# Altium PCB LinoByte - Char.PcbDoc (part 1 of 2)
Units mm, origin at the board's own origin, x right, y up, seen from the top; angles counter-clockwise.
Board outline 23 x 220 mm, 4 copper layers (Top Layer, Mid1, Mid2, Bottom Layer), stack 0.778 mm thick; 224 components, 110 nets, 606 pads, 169 vias.
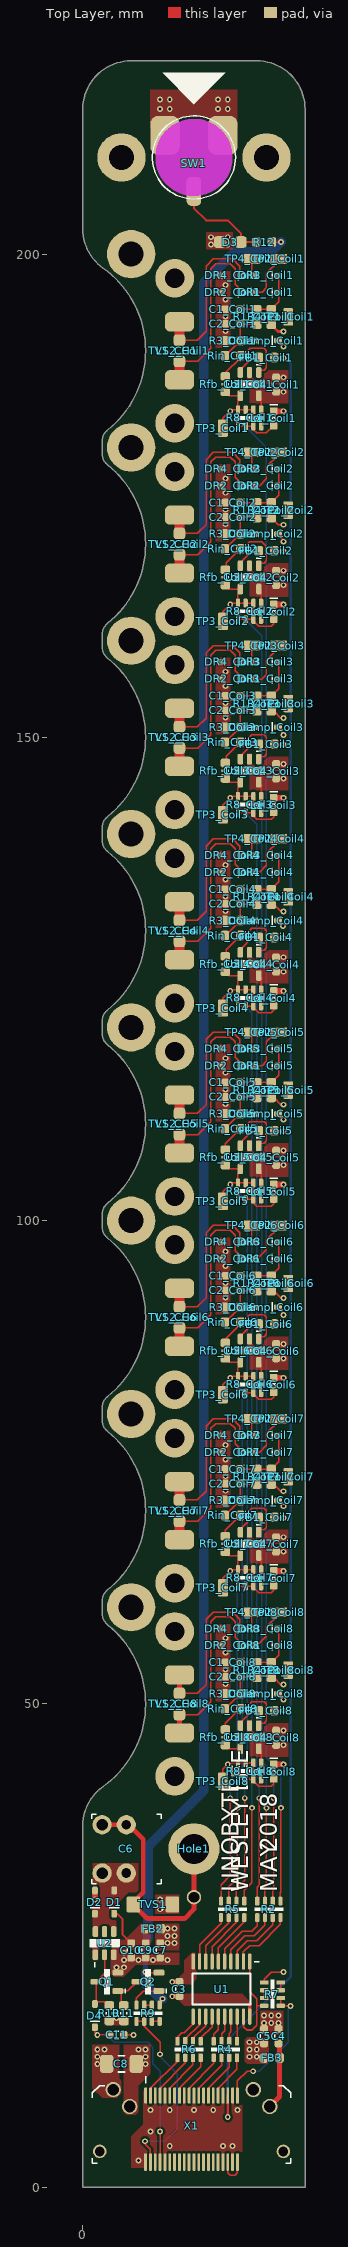
[diagram p0: Top Layer view]
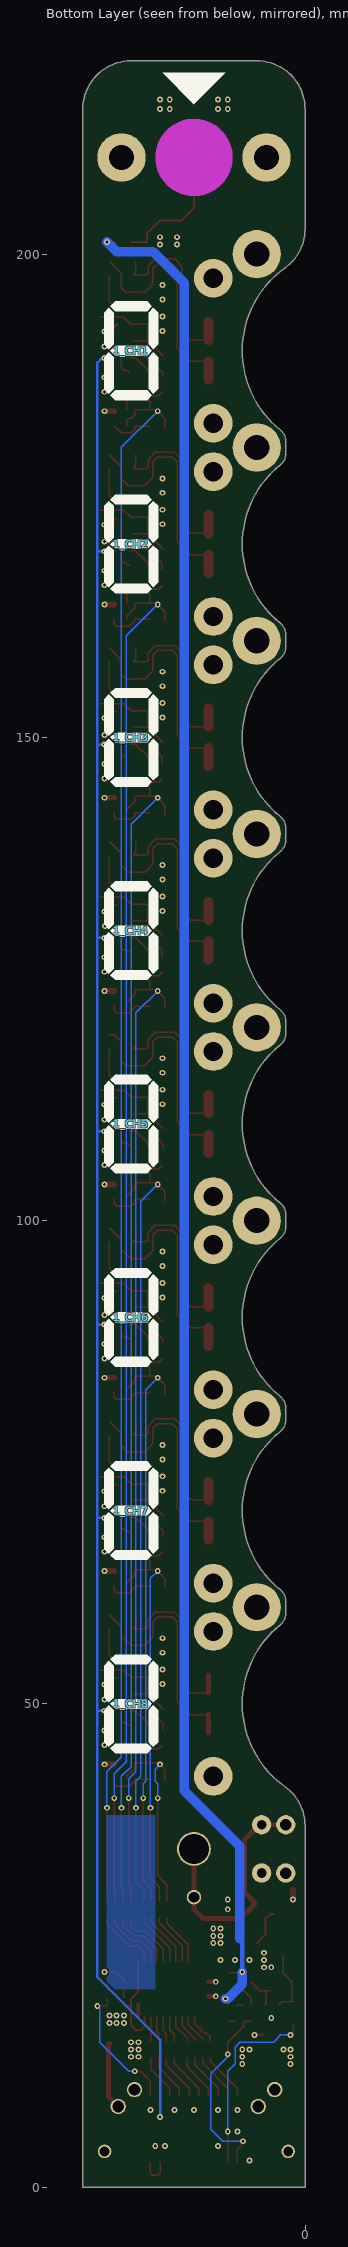
[diagram p1: Bottom Layer view, seen from below]
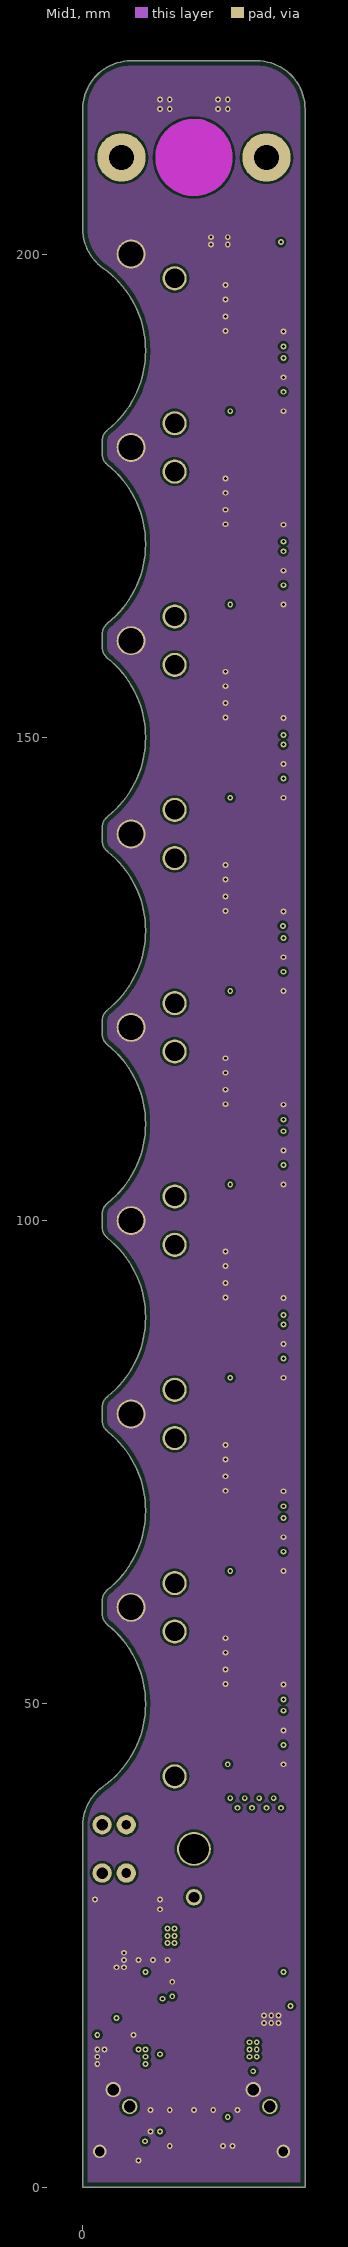
[diagram p2: Mid1]
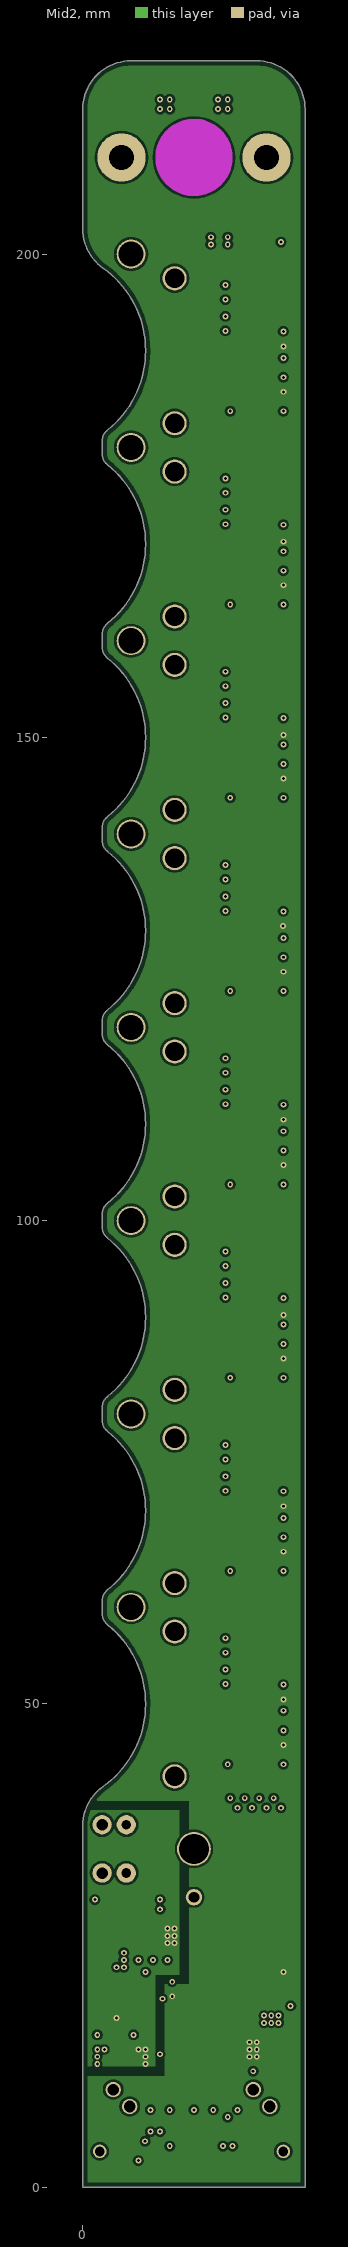
[diagram p3: Mid2]
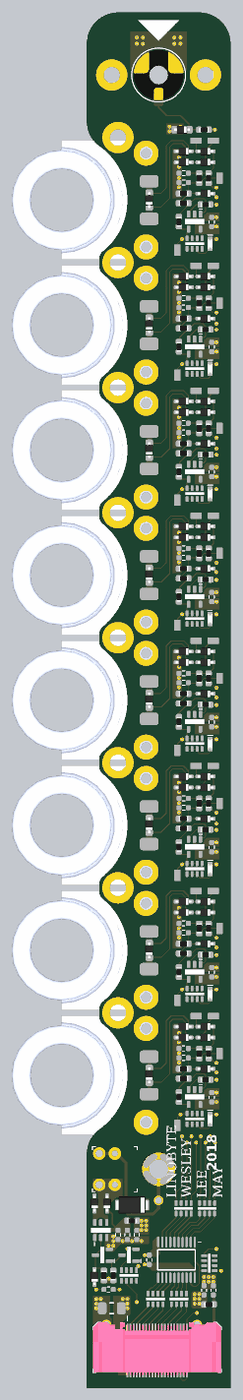
[diagram p5: 3D render of the assembled board from above, using the file's embedded part models]

## Layer stack, top to bottom
Top Solder: solder mask 0.0102, Solder Resist, Dk 3.5
Top Layer: signal copper 0.0356
Dielectric 1: core 0.254, FR-4, Dk 4.2
Mid1: signal copper 0.036
Dielectric 3: prepreg 0.127, Dk 4.2
Mid2: signal copper 0.036
Dielectric 2: core 0.254, Dk 4.2
Bottom Layer: signal copper 0.0356
Bottom Solder: solder mask 0.0102, Solder Resist, Dk 3.5

## Board outline
0,37.381 cw(c5,37.381) 2.097,41.451 ccw(c-4,50) 2.562,58.197 2.563,58.197 cw(c3.5,59.367) 2,59.367 2,60.633 cw(c3.5,60.633) 2.563,61.803 2.562,61.803 ccw(c-4,70) 2.562,78.197 2.563,78.197 cw(c3.5,79.367) 2,79.367 2,80.633 cw(c3.5,80.633) 2.563,81.803 2.562,81.803 ccw(c-4,90) 2.562,98.197 2.563,98.197 cw(c3.5,99.367) 2,99.367 2,100.633 cw(c3.5,100.633) 2.563,101.803 2.562,101.803 ccw(c-4,110) 2.562,118.197 2.563,118.197 cw(c3.5,119.367) 2,119.367 2,120.633 cw(c3.5,120.633) 2.563,121.803 2.562,121.803 ccw(c-4,130) 2.562,138.197 2.563,138.197 cw(c3.5,139.367) 2,139.367 2,140.633 cw(c3.5,140.633) 2.563,141.803 2.562,141.803 ccw(c-4,150) 2.562,158.197 2.563,158.197 cw(c3.5,159.367) 2,159.367 2,160.633 cw(c3.5,160.633) 2.563,161.803 2.562,161.803 ccw(c-4,170) 2.562,178.197 2.563,178.197 cw(c3.5,179.367) 2,179.367 2,180.633 cw(c3.5,180.633) 2.563,181.803 2.562,181.803 ccw(c-4,190) 2.097,198.549 cw(c5,202.619) 0,202.619 0,215 cw(c5,215) 5,220 18,220 cw(c18,215) 23,215 23,0 0,0

## Design rules (kind name [scope] priority, off if disabled: settings)
BoardOutlineClearance BoardOutlineClearance-Mid [OnLayer('Mid1') or OnLayer('Mid2')] p1: gap=0.5 ignorepadtopadclearanceinfootprint=FALSE
BoardOutlineClearance [All] p2: gap=0.25 ignorepadtopadclearanceinfootprint=FALSE except(0: Arc-SplitContinuation Track-SplitContinuation SMDPad-SplitContinuation THPad-SplitContinuation Via-SplitContinuation Fill-SplitContinuation Poly-SplitContinuation Region-SplitContinuation Text-SplitContinuation)
Clearance Clearance-xPP-xTP-xTT [All] p1: gap=0.15 ignorepadtopadclearanceinfootprint=FALSE except(0: Arc-Hole Track-Hole SMDPad-Hole THPad-Hole Via-Hole Fill-Hole Poly-Hole Region-Hole Text-Hole; 0.25: Arc-Fill Arc-Poly Arc-Region Track-Fill Track-Poly Track-Region SMDPad-Fill SMDPad-Poly SMDPad-Region THPad-Fill THPad-Poly THPad-Region Via-Fill Via-Poly Via-Region Fill-Fill Fill-Poly Fill-Region Poly-Poly Poly-Region Region-Region)
ComponentClearance [All] p1: gap=0.25 collisioncheckmode=3 verticalgap=0.25 showdistances=FALSE
DiffPairsRouting [All] p1: maxlimit=0.25 minlimit=0.25 mostfreqgap=0.25 toplayer_minwidth=0.381 toplayer_maxwidth=0.381 toplayer_prefwidth=0.381 midlayer1_minwidth=0.381 midlayer1_maxwidth=0.381 midlayer1_prefwidth=0.381 midlayer2_minwidth=0.381 midlayer2_maxwidth=0.381 midlayer2_prefwidth=0.381 bottomlayer_minwidth=0.381 bottomlayer_maxwidth=0.381 bottomlayer_prefwidth=0.381 maxuncoupledlength=12.5
Height [All] p1: minheight=0 maxheight=25 prefheight=12.5
HoleSize HoleSize-PTH [All] p1: absolutevalues=TRUE maxlimit=6 minlimit=0.25 maxpercent=80.000 minpercent=20.000
HoleToHoleClearance [All] p1: gap=0.35 allowstackedmicrovias=TRUE
MinimumAnnularRing "Minimum IAR  >0.45mm" [((ObjectKind = 'Pad') OR (ObjectKind = 'Via')) And (Layer = 'MultiLayer') And (HoleDiameter > AsMM(0.45))] p1: minimumring=0.175 // minimum inner annular ring for pads > 0.45mm finished hole size
MinimumAnnularRing "Minimum IAR <=0.45mm" [((ObjectKind = 'Pad') OR (ObjectKind = 'Via')) And (Layer = 'MultiLayer') And (HoleDiameter <= AsMM(0.45))] p2: minimumring=0.15 // minimum inner annular ring for pads <= 0.45mm finished hole size
MinimumSolderMaskSliver [All] p1: minsoldermaskwidth=0.08
PlaneClearance PlaneClearance-IPI [All] p1: clearance=0.5
PlaneConnect [All] p1: planeconnectstyle=Relief reliefexpansion=0.175 reliefentries=4 reliefconductorwidth=0.2 reliefairgap=0.2
PolygonConnect PolygonConnect-xTW [All] p1: connectstyle=Direct reliefconductorwidth=0.2 reliefentries=4 polygonreliefangle="90 Angle" airgapwidth=0.2
RoomDefinition Coil1 [InComponentClass('Coil1')] p1: confinementstyle=ConfineIn formatcopy=TRUE lockcomponents=FALSE outline 8.871,187.944 8.871,192.056 13.521,192.056 13.521,198.929 16.244,198.929 16.244,200.356 21.506,200.356 21.506,194.756 22.106,194.756 22.106,192.244 20.979,192.244 20.979,189.921 20.779,189.921 20.779,184.871 20.779,181.324 19.329,181.324 19.329,181.271 15.356,181.271 15.356,180.744 13.644,180.744 13.644,187.944
RoomDefinition Coil2 [InComponentClass('Coil2')] p2: confinementstyle=ConfineIn formatcopy=TRUE lockcomponents=FALSE outline 8.871,167.944 8.871,172.056 13.521,172.056 13.521,178.929 16.244,178.929 16.244,180.356 21.506,180.356 21.506,174.756 22.106,174.756 22.106,172.244 20.979,172.244 20.979,169.921 20.779,169.921 20.779,164.871 20.779,161.324 19.329,161.324 19.329,161.271 15.356,161.271 15.356,160.744 13.644,160.744 13.644,167.944
RoomDefinition Coil3 [InComponentClass('Coil3')] p3: confinementstyle=ConfineIn formatcopy=TRUE lockcomponents=FALSE outline 8.871,147.944 8.871,152.056 13.521,152.056 13.521,158.929 16.244,158.929 16.244,160.356 21.506,160.356 21.506,154.756 22.106,154.756 22.106,152.244 20.979,152.244 20.979,149.921 20.779,149.921 20.779,144.871 20.779,141.324 19.329,141.324 19.329,141.271 15.356,141.271 15.356,140.744 13.644,140.744 13.644,147.944
RoomDefinition Coil4 [InComponentClass('Coil4')] p4: confinementstyle=ConfineIn formatcopy=TRUE lockcomponents=FALSE outline 8.871,127.944 8.871,132.056 13.521,132.056 13.521,138.929 16.244,138.929 16.244,140.356 21.506,140.356 21.506,134.756 22.106,134.756 22.106,132.244 20.979,132.244 20.979,129.921 20.779,129.921 20.779,124.871 20.779,121.324 19.329,121.324 19.329,121.271 15.356,121.271 15.356,120.744 13.644,120.744 13.644,127.944
RoomDefinition Coil5 [InComponentClass('Coil5')] p5: confinementstyle=ConfineIn formatcopy=TRUE lockcomponents=FALSE outline 8.871,107.944 8.871,112.056 13.521,112.056 13.521,118.929 16.244,118.929 16.244,120.356 21.506,120.356 21.506,114.756 22.106,114.756 22.106,112.244 20.979,112.244 20.979,109.921 20.779,109.921 20.779,104.871 20.779,101.324 19.329,101.324 19.329,101.271 15.356,101.271 15.356,100.744 13.644,100.744 13.644,107.944
RoomDefinition Coil7 [InComponentClass('Coil7')] p6: confinementstyle=ConfineIn formatcopy=TRUE lockcomponents=FALSE outline 8.871,67.944 8.871,72.056 13.521,72.056 13.521,78.929 16.244,78.929 16.244,80.356 21.506,80.356 21.506,74.756 22.106,74.756 22.106,72.244 20.979,72.244 20.979,69.921 20.779,69.921 20.779,64.871 20.779,61.324 19.329,61.324 19.329,61.271 15.356,61.271 15.356,60.744 13.644,60.744 13.644,67.944
RoomDefinition Coil8 [InComponentClass('Coil8')] p7: confinementstyle=ConfineIn formatcopy=TRUE lockcomponents=FALSE outline 8.871,47.944 8.871,52.056 13.521,52.056 13.521,58.929 16.244,58.929 16.244,60.356 21.506,60.356 21.506,54.756 22.106,54.756 22.106,52.244 20.979,52.244 20.979,49.921 20.779,49.921 20.779,44.871 20.779,41.324 19.329,41.324 19.329,41.271 15.356,41.271 15.356,40.744 13.644,40.744 13.644,47.944
RoomDefinition Coil6 [InComponentClass('Coil6')] p8: confinementstyle=ConfineIn formatcopy=TRUE lockcomponents=FALSE outline 8.871,87.944 8.871,92.056 13.521,92.056 13.521,98.929 16.244,98.929 16.244,100.356 21.506,100.356 21.506,94.756 22.106,94.756 22.106,92.244 20.979,92.244 20.979,89.921 20.779,89.921 20.779,84.871 20.779,81.324 19.329,81.324 19.329,81.271 15.356,81.271 15.356,80.744 13.644,80.744 13.644,87.944
RoutingCorners [All] p1: cornerstyle=45-Degree minsetback=2.5 maxsetback=2.5
RoutingVias "RoutingVias 0.3mm" [All] p1: holewidth=0.3 width=0.6 viastyle="Through Hole" minholewidth=0.3 minwidth=0.6 maxholewidth=0.5 maxwidth=0.8 // finishet hole size <= 0.45mm
SilkToSilkClearance [All] p1: silktosilkclearance=0.2
SilkToSolderMaskClearance SilkscreenOverComponentPads [IsPad] p1: minsilkscreentomaskgap=0.1 clearancetoexposedcopper=TRUE
SolderMaskExpansion "0.3mm Via" [(ObjectKind = 'Via') And (HoleDiameter = AsMM(0.3))] p1: expansion=-0.15 soldermaskfromhole=TRUE
SolderMaskExpansion [All] p2: expansion=0
UnRoutedNet [All] p1: checkbadconnections=TRUE
Width Width-xTW [All] p1: maxlimit=1.5 minlimit=0.15 preferedwidth=0.2
18 further rules are at their usual default settings.

## Classes and differential pairs
channel class LB-char-coilRectifier: Coil1 Coil2 Coil3 Coil4 Coil5 Coil6 Coil7 Coil8
channel class LB-char-coilHolder: CH1 CH2 CH3 CH4 CH5 CH6 CH7 CH8
component class U_CoilDriver: C6 C7 C8 C9 C10 C11 D1 D2 D3 D4 FB2 Hole1 Q1 Q2 R9 R10 R11 R12 SW1 TVS1 U2
component class CH8: 1_CH8 L1_CH8
component class CH7: 1_CH7 L1_CH7
component class CH6: 1_CH6 L1_CH6
component class CH5: 1_CH5 L1_CH5
component class CH4: 1_CH4 L1_CH4
component class CH3: 1_CH3 L1_CH3
component class CH2: 1_CH2 L1_CH2
component class CH1: 1_CH1 L1_CH1
component class Coil8: C1_Coil8 C1_CR8 C2_Coil8 C2_CR8 C4_Coil8 C4_CR8 DClamp_Coil8 DClamp_CR8 DR1_Coil8 DR1_CR8 DR2_Coil8 DR2_CR8 DR3_Coil8 DR3_CR8 DR4_Coil8 DR4_CR8 FB1_Coil8 FB1_CR8 L1_Coil8 L1_CR8 R1_Coil8 R1_CR8 R3_Coil8 R3_CR8 R4_Coil8 R8_Coil8 R8_CR8 Rfb_Coil8 Rfb_CR8 Rin_Coil8 Rin_CR8 TP1_Coil8 TP2_Coil8 TP3_Coil8 TP4_Coil8 TVS2_Coil8 U1_CR8 U3_Coil8
component class Coil7: C1_Coil7 C1_CR7 C2_Coil7 C2_CR7 C4_Coil7 C4_CR7 DClamp_Coil7 DClamp_CR7 DR1_Coil7 DR1_CR7 DR2_Coil7 DR2_CR7 DR3_Coil7 DR3_CR7 DR4_Coil7 DR4_CR7 FB1_Coil7 FB1_CR7 L1_Coil7 L1_CR7 R1_Coil7 R1_CR7 R3_Coil7 R3_CR7 R4_Coil7 R8_Coil7 R8_CR7 Rfb_Coil7 Rfb_CR7 Rin_Coil7 Rin_CR7 TP1_Coil7 TP2_Coil7 TP3_Coil7 TP4_Coil7 TVS2_Coil7 U1_CR7 U3_Coil7
component class Coil6: C1_Coil6 C1_CR6 C2_Coil6 C2_CR6 C4_Coil6 C4_CR6 DClamp_Coil6 DClamp_CR6 DR1_Coil6 DR1_CR6 DR2_Coil6 DR2_CR6 DR3_Coil6 DR3_CR6 DR4_Coil6 DR4_CR6 FB1_Coil6 FB1_CR6 L1_Coil6 L1_CR6 R1_Coil6 R1_CR6 R3_Coil6 R3_CR6 R4_Coil6 R8_Coil6 R8_CR6 Rfb_Coil6 Rfb_CR6 Rin_Coil6 Rin_CR6 TP1_Coil6 TP2_Coil6 TP3_Coil6 TP4_Coil6 TVS2_Coil6 U1_CR6 U3_Coil6
component class Coil5: C1_Coil5 C1_CR5 C2_Coil5 C2_CR5 C4_Coil5 C4_CR5 DClamp_Coil5 DClamp_CR5 DR1_Coil5 DR1_CR5 DR2_Coil5 DR2_CR5 DR3_Coil5 DR3_CR5 DR4_Coil5 DR4_CR5 FB1_Coil5 FB1_CR5 L1_Coil5 L1_CR5 R1_Coil5 R1_CR5 R3_Coil5 R3_CR5 R4_Coil5 R8_Coil5 R8_CR5 Rfb_Coil5 Rfb_CR5 Rin_Coil5 Rin_CR5 TP1_Coil5 TP2_Coil5 TP3_Coil5 TP4_Coil5 TVS2_Coil5 U1_CR5 U3_Coil5
component class Coil4: C1_Coil4 C1_CR4 C2_Coil4 C2_CR4 C4_Coil4 C4_CR4 DClamp_Coil4 DClamp_CR4 DR1_Coil4 DR1_CR4 DR2_Coil4 DR2_CR4 DR3_Coil4 DR3_CR4 DR4_Coil4 DR4_CR4 FB1_Coil4 FB1_CR4 L1_Coil4 L1_CR4 R1_Coil4 R1_CR4 R3_Coil4 R3_CR4 R4_Coil4 R8_Coil4 R8_CR4 Rfb_Coil4 Rfb_CR4 Rin_Coil4 Rin_CR4 TP1_Coil4 TP2_Coil4 TP3_Coil4 TP4_Coil4 TVS2_Coil4 U1_CR4 U3_Coil4
component class Coil3: C1_Coil3 C1_CR3 C2_Coil3 C2_CR3 C4_Coil3 C4_CR3 DClamp_Coil3 DClamp_CR3 DR1_Coil3 DR1_CR3 DR2_Coil3 DR2_CR3 DR3_Coil3 DR3_CR3 DR4_Coil3 DR4_CR3 FB1_Coil3 FB1_CR3 L1_Coil3 L1_CR3 R1_Coil3 R1_CR3 R3_Coil3 R3_CR3 R4_Coil3 R8_Coil3 R8_CR3 Rfb_Coil3 Rfb_CR3 Rin_Coil3 Rin_CR3 TP1_Coil3 TP2_Coil3 TP3_Coil3 TP4_Coil3 TVS2_Coil3 U1_CR3 U3_Coil3
component class Coil2: C1_Coil2 C1_CR2 C2_Coil2 C2_CR2 C4_Coil2 C4_CR2 DClamp_Coil2 DClamp_CR2 DR1_Coil2 DR1_CR2 DR2_Coil2 DR2_CR2 DR3_Coil2 DR3_CR2 DR4_Coil2 DR4_CR2 FB1_Coil2 FB1_CR2 L1_Coil2 L1_CR2 R1_Coil2 R1_CR2 R3_Coil2 R3_CR2 R4_Coil2 R8_Coil2 R8_CR2 Rfb_Coil2 Rfb_CR2 Rin_Coil2 Rin_CR2 TP1_Coil2 TP2_Coil2 TP3_Coil2 TP4_Coil2 TVS2_Coil2 U1_CR2 U3_Coil2
component class Coil1: C1_Coil1 C1_CR1 C2_Coil1 C2_CR1 C4_Coil1 C4_CR1 DClamp_Coil1 DClamp_CR1 DR1_Coil1 DR1_CR1 DR2_Coil1 DR2_CR1 DR3_Coil1 DR3_CR1 DR4_Coil1 DR4_CR1 FB1_Coil1 FB1_CR1 L1_Coil1 L1_CR1 R1_Coil1 R1_CR1 R3_Coil1 R3_CR1 R4_Coil1 R8_Coil1 R8_CR1 Rfb_Coil1 Rfb_CR1 Rin_Coil1 Rin_CR1 TP1_Coil1 TP2_Coil1 TP3_Coil1 TP4_Coil1 TVS2_Coil1 U1_CR1 U3_Coil1
component class LB-char-topLevel: C3 C4 C5 FB3 R2 R4 R5 R6 R7 U1 X1

## Components (designator, comment, footprint, x,y, rotation, side; value= is the part's Value field where it differs from the comment)
1_CH1 "Silkscreen Digit" PCB-7SEG-10MM 18,190 r180 bottom (schematic designator 1)
1_CH2 "Silkscreen Digit" PCB-7SEG-10MM 18,170 r180 bottom (schematic designator 1)
1_CH3 "Silkscreen Digit" PCB-7SEG-10MM 18,150 r180 bottom (schematic designator 1)
1_CH4 "Silkscreen Digit" PCB-7SEG-10MM 18,130 r180 bottom (schematic designator 1)
1_CH5 "Silkscreen Digit" PCB-7SEG-10MM 18,110 r180 bottom (schematic designator 1)
1_CH6 "Silkscreen Digit" PCB-7SEG-10MM 18,90 r180 bottom (schematic designator 1)
1_CH7 "Silkscreen Digit" PCB-7SEG-10MM 18,70 r180 bottom (schematic designator 1)
1_CH8 "Silkscreen Digit" PCB-7SEG-10MM 18,50 r180 bottom (schematic designator 1)
C1_Coil1 "" C0603_N 15.5,194.3 r180 top (schematic designator C1)
C1_Coil2 "" C0603_N 15.5,174.3 r180 top (schematic designator C1)
C1_Coil3 "" C0603_N 15.5,154.3 r180 top (schematic designator C1)
C1_Coil4 "" C0603_N 15.5,134.3 r180 top (schematic designator C1)
C1_Coil5 "" C0603_N 15.5,114.3 r180 top (schematic designator C1)
C1_Coil6 "" C0603_N 15.5,94.3 r180 top (schematic designator C1)
C1_Coil7 "" C0603_N 15.5,74.3 r180 top (schematic designator C1)
C1_Coil8 "" C0603_N 15.5,54.3 r180 top (schematic designator C1)
C2_Coil1 "" C0603_N 15.5,192.8 r180 top (schematic designator C2)
C2_Coil2 "" C0603_N 15.5,172.8 r180 top (schematic designator C2)
C2_Coil3 "" C0603_N 15.5,152.8 r180 top (schematic designator C2)
C2_Coil4 "" C0603_N 15.5,132.8 r180 top (schematic designator C2)
C2_Coil5 "" C0603_N 15.5,112.8 r180 top (schematic designator C2)
C2_Coil6 "" C0603_N 15.5,92.8 r180 top (schematic designator C2)
C2_Coil7 "" C0603_N 15.5,72.8 r180 top (schematic designator C2)
C2_Coil8 "" C0603_N 15.5,52.8 r180 top (schematic designator C2)
C3 "100nF" C0603_N 10,20.5 r90 top
C4 "100nF" C0603_N 20.25,15.625 r90 top
C4_Coil1 "" C0603_N 20,186.5 r90 top (schematic designator C4)
C4_Coil2 "" C0603_N 20,166.5 r90 top (schematic designator C4)
C4_Coil3 "" C0603_N 20,146.5 r90 top (schematic designator C4)
C4_Coil4 "" C0603_N 20,126.5 r90 top (schematic designator C4)
C4_Coil5 "" C0603_N 20,106.5 r90 top (schematic designator C4)
C4_Coil6 "" C0603_N 20,86.5 r90 top (schematic designator C4)
C4_Coil7 "" C0603_N 20,66.5 r90 top (schematic designator C4)
C4_Coil8 "" C0603_N 20,46.5 r90 top (schematic designator C4)
C5 "100nF" C0603_N 18.75,15.625 r90 top
C6 "Film" "CAP FILM 5MM PITCH, 7.2X7.2MM" 4.5,35 r270 top
C7 "100nF" C0603_N 8,24.5 r270 top
C8 "4u7F" C1206_N 4,12.75 r180 top
C9 "1uF" C0603_N 6.5,24.5 r270 top
C10 "100nF" C0603_N 5,24.5 r270 top
C11 "" C0603_N 3.5,15.75 r0 top
D1 "Diode" SOD323F 3.25,29.5 r270 top
D2 "Diode" SOD323F 1.25,29.5 r270 top
D3 "TVS" ? 15.25,201.25 r0 top
D4 "Schottky" SOD323F 1.25,17.75 r270 top
DClamp_Coil1 "Diode" SOD323F 19,191.05 r0 top (schematic designator DClamp)
DClamp_Coil2 "Diode" SOD323F 19,171.05 r0 top (schematic designator DClamp)
DClamp_Coil3 "Diode" SOD323F 19,151.05 r0 top (schematic designator DClamp)
DClamp_Coil4 "Diode" SOD323F 19,131.05 r0 top (schematic designator DClamp)
DClamp_Coil5 "Diode" SOD323F 19,111.05 r0 top (schematic designator DClamp)
DClamp_Coil6 "Diode" SOD323F 19,91.05 r0 top (schematic designator DClamp)
DClamp_Coil7 "Diode" SOD323F 19,71.05 r0 top (schematic designator DClamp)
DClamp_Coil8 "Diode" SOD323F 19,51.05 r0 top (schematic designator DClamp)
DR1_Coil1 "Diode" SOD323F 19,196.05 r0 top (schematic designator DR1)
DR1_Coil2 "Diode" SOD323F 19,176.05 r0 top (schematic designator DR1)
DR1_Coil3 "Diode" SOD323F 19,156.05 r0 top (schematic designator DR1)
DR1_Coil4 "Diode" SOD323F 19,136.05 r0 top (schematic designator DR1)
DR1_Coil5 "Diode" SOD323F 19,116.05 r0 top (schematic designator DR1)
DR1_Coil6 "Diode" SOD323F 19,96.05 r0 top (schematic designator DR1)
DR1_Coil7 "Diode" SOD323F 19,76.05 r0 top (schematic designator DR1)
DR1_Coil8 "Diode" SOD323F 19,56.05 r0 top (schematic designator DR1)
DR2_Coil1 "Diode" SOD323F 15.5,196.05 r0 top (schematic designator DR2)
DR2_Coil2 "Diode" SOD323F 15.5,176.05 r0 top (schematic designator DR2)
DR2_Coil3 "Diode" SOD323F 15.5,156.05 r0 top (schematic designator DR2)
DR2_Coil4 "Diode" SOD323F 15.5,136.05 r0 top (schematic designator DR2)
DR2_Coil5 "Diode" SOD323F 15.5,116.05 r0 top (schematic designator DR2)
DR2_Coil6 "Diode" SOD323F 15.5,96.05 r0 top (schematic designator DR2)
DR2_Coil7 "Diode" SOD323F 15.5,76.05 r0 top (schematic designator DR2)
DR2_Coil8 "Diode" SOD323F 15.5,56.05 r0 top (schematic designator DR2)
DR3_Coil1 "Diode" SOD323F 19,197.8 r0 top (schematic designator DR3)
DR3_Coil2 "Diode" SOD323F 19,177.8 r0 top (schematic designator DR3)
DR3_Coil3 "Diode" SOD323F 19,157.8 r0 top (schematic designator DR3)
DR3_Coil4 "Diode" SOD323F 19,137.8 r0 top (schematic designator DR3)
DR3_Coil5 "Diode" SOD323F 19,117.8 r0 top (schematic designator DR3)
DR3_Coil6 "Diode" SOD323F 19,97.8 r0 top (schematic designator DR3)
DR3_Coil7 "Diode" SOD323F 19,77.8 r0 top (schematic designator DR3)
DR3_Coil8 "Diode" SOD323F 19,57.8 r0 top (schematic designator DR3)
DR4_Coil1 "Diode" SOD323F 15.5,197.8 r0 top (schematic designator DR4)
DR4_Coil2 "Diode" SOD323F 15.5,177.8 r0 top (schematic designator DR4)
DR4_Coil3 "Diode" SOD323F 15.5,157.8 r0 top (schematic designator DR4)
DR4_Coil4 "Diode" SOD323F 15.5,137.8 r0 top (schematic designator DR4)
DR4_Coil5 "Diode" SOD323F 15.5,117.8 r0 top (schematic designator DR4)
DR4_Coil6 "Diode" SOD323F 15.5,97.8 r0 top (schematic designator DR4)
DR4_Coil7 "Diode" SOD323F 15.5,77.8 r0 top (schematic designator DR4)
DR4_Coil8 "Diode" SOD323F 15.5,57.8 r0 top (schematic designator DR4)
FB1_Coil1 "Resistor" R0603 19,189.3 r180 top (schematic designator FB1)
FB1_Coil2 "Resistor" R0603 19,169.3 r180 top (schematic designator FB1)
FB1_Coil3 "Resistor" R0603 19,149.3 r180 top (schematic designator FB1)
FB1_Coil4 "Resistor" R0603 19,129.3 r180 top (schematic designator FB1)
FB1_Coil5 "Resistor" R0603 19,109.3 r180 top (schematic designator FB1)
FB1_Coil6 "Resistor" R0603 19,89.3 r180 top (schematic designator FB1)
FB1_Coil7 "Resistor" R0603 19,69.3 r180 top (schematic designator FB1)
FB1_Coil8 "Resistor" R0603 19,49.3 r180 top (schematic designator FB1)
FB2 "Ferrite Bead" F0603_N 7.25,26.75 r0 top
FB3 "Ferrite Bead" F0603_N 19.55,13.375 r180 top
Hole1 "Hole" INSERT-THREAD-SMD-M2 11.5,35 r0 top
L1_CH1 "linobyte-coil" LINOBYTE-COIL 12,190 r0 top (schematic designator L1)
L1_CH2 "linobyte-coil" LINOBYTE-COIL 12,170 r0 top (schematic designator L1)
L1_CH3 "linobyte-coil" LINOBYTE-COIL 12,150 r0 top (schematic designator L1)
L1_CH4 "linobyte-coil" LINOBYTE-COIL 12,130 r0 top (schematic designator L1)
L1_CH5 "linobyte-coil" LINOBYTE-COIL 12,110 r0 top (schematic designator L1)
L1_CH6 "linobyte-coil" LINOBYTE-COIL 12,90 r0 top (schematic designator L1)
L1_CH7 "linobyte-coil" LINOBYTE-COIL 12,70 r0 top (schematic designator L1)
L1_CH8 "linobyte-coil" LINOBYTE-COIL 12,50 r0 top (schematic designator L1)
L1_Coil1 "LED" "LED 0603/1608" 19.75,183 r90 top (schematic designator L1)
L1_Coil2 "LED" "LED 0603/1608" 19.75,163 r90 top (schematic designator L1)
L1_Coil3 "LED" "LED 0603/1608" 19.75,143 r90 top (schematic designator L1)
L1_Coil4 "LED" "LED 0603/1608" 19.75,123 r90 top (schematic designator L1)
L1_Coil5 "LED" "LED 0603/1608" 19.75,103 r90 top (schematic designator L1)
L1_Coil6 "LED" "LED 0603/1608" 19.75,83 r90 top (schematic designator L1)
L1_Coil7 "LED" "LED 0603/1608" 19.75,63 r90 top (schematic designator L1)
L1_Coil8 "LED" "LED 0603/1608" 19.75,43 r90 top (schematic designator L1)
Q1 "MOSFET N CH" SOT23_N 2.5,21.25 r180 top
Q2 "MOSFET N CH" SOT23_N 6.75,21.25 r180 top
R1_Coil1 "Resistor" R0603 18,193.5 r270 top (schematic designator R1)
R1_Coil2 "Resistor" R0603 18,173.5 r270 top (schematic designator R1)
R1_Coil3 "Resistor" R0603 18,153.5 r270 top (schematic designator R1)
R1_Coil4 "Resistor" R0603 18,133.5 r270 top (schematic designator R1)
R1_Coil5 "Resistor" R0603 18,113.5 r270 top (schematic designator R1)
R1_Coil6 "Resistor" R0603 18,93.5 r270 top (schematic designator R1)
R1_Coil7 "Resistor" R0603 18,73.5 r270 top (schematic designator R1)
R1_Coil8 "Resistor" R0603 18,53.5 r270 top (schematic designator R1)
R2 "Resistor Array - 4P" YC164 19.25,28.75 r180 top value=1k
R3_Coil1 "Resistor" R0603 15.5,191.05 r0 top (schematic designator R3)
R3_Coil2 "Resistor" R0603 15.5,171.05 r0 top (schematic designator R3)
R3_Coil3 "Resistor" R0603 15.5,151.05 r0 top (schematic designator R3)
R3_Coil4 "Resistor" R0603 15.5,131.05 r0 top (schematic designator R3)
R3_Coil5 "Resistor" R0603 15.5,111.05 r0 top (schematic designator R3)
R3_Coil6 "Resistor" R0603 15.5,91.05 r0 top (schematic designator R3)
R3_Coil7 "Resistor" R0603 15.5,71.05 r0 top (schematic designator R3)
R3_Coil8 "Resistor" R0603 15.5,51.05 r0 top (schematic designator R3)
R4 "Resistor Array - 4P" YC164 14.75,14.25 r180 top value=160R
R4_Coil1 "Resistor" R0603 19.5,193.5 r90 top (schematic designator R4)
R4_Coil2 "Resistor" R0603 19.5,173.5 r90 top (schematic designator R4)
R4_Coil3 "Resistor" R0603 19.5,153.5 r90 top (schematic designator R4)
R4_Coil4 "Resistor" R0603 19.5,133.5 r90 top (schematic designator R4)
R4_Coil5 "Resistor" R0603 19.5,113.5 r90 top (schematic designator R4)
R4_Coil6 "Resistor" R0603 19.5,93.5 r90 top (schematic designator R4)
R4_Coil7 "Resistor" R0603 19.5,73.5 r90 top (schematic designator R4)
R4_Coil8 "Resistor" R0603 19.5,53.5 r90 top (schematic designator R4)
R5 "Resistor Array - 4P" YC164 15.5,28.75 r180 top value=1k
R6 "Resistor Array - 4P" YC164 11,14.25 r180 top value=160R
R7 "Resistor Array - 4P" YC164 19.625,19.975 r270 top value=1k
R8_Coil1 "Resistor Array - 4P" YC164 17.25,183.05 r180 top (schematic designator R8)
R8_Coil2 "Resistor Array - 4P" YC164 17.25,163.05 r180 top (schematic designator R8)
R8_Coil3 "Resistor Array - 4P" YC164 17.25,143.05 r180 top (schematic designator R8)
R8_Coil4 "Resistor Array - 4P" YC164 17.25,123.05 r180 top (schematic designator R8)
R8_Coil5 "Resistor Array - 4P" YC164 17.25,103.05 r180 top (schematic designator R8)
R8_Coil6 "Resistor Array - 4P" YC164 17.25,83.05 r180 top (schematic designator R8)
R8_Coil7 "Resistor Array - 4P" YC164 17.25,63.05 r180 top (schematic designator R8)
R8_Coil8 "Resistor Array - 4P" YC164 17.25,43.05 r180 top (schematic designator R8)
R9 "Resistor Array - 4P" YC164 6.75,18 r0 top
R10 "Resistor" R0603 2.75,18 r270 top
R11 "Resistor" R0603 4.25,18 r270 top
R12 "Resistor" R0603 18.75,201.25 r180 top
Rfb_Coil1 "Resistor" R0603 14.75,186.55 r270 top (schematic designator Rfb)
Rfb_Coil2 "Resistor" R0603 14.75,166.55 r270 top (schematic designator Rfb)
Rfb_Coil3 "Resistor" R0603 14.75,146.55 r270 top (schematic designator Rfb)
Rfb_Coil4 "Resistor" R0603 14.75,126.55 r270 top (schematic designator Rfb)
Rfb_Coil5 "Resistor" R0603 14.75,106.55 r270 top (schematic designator Rfb)
Rfb_Coil6 "Resistor" R0603 14.75,86.55 r270 top (schematic designator Rfb)
Rfb_Coil7 "Resistor" R0603 14.75,66.55 r270 top (schematic designator Rfb)
Rfb_Coil8 "Resistor" R0603 14.75,46.55 r270 top (schematic designator Rfb)
Rin_Coil1 "Resistor" R0603 15.5,189.5 r0 top (schematic designator Rin)
Rin_Coil2 "Resistor" R0603 15.5,169.5 r0 top (schematic designator Rin)
Rin_Coil3 "Resistor" R0603 15.5,149.5 r0 top (schematic designator Rin)
Rin_Coil4 "Resistor" R0603 15.5,129.5 r0 top (schematic designator Rin)
Rin_Coil5 "Resistor" R0603 15.5,109.5 r0 top (schematic designator Rin)
Rin_Coil6 "Resistor" R0603 15.5,89.5 r0 top (schematic designator Rin)
Rin_Coil7 "Resistor" R0603 15.5,69.5 r0 top (schematic designator Rin)
Rin_Coil8 "Resistor" R0603 15.5,49.5 r0 top (schematic designator Rin)
SW1 "Switch for the magnet" "LINOBYTE - MAGNETSWITCH" 11.5,210 r180 top
TP1_Coil1 "Test Point" "HARWIN S2751-46R" 21.25,193.5 r270 top (schematic designator TP1)
TP1_Coil2 "Test Point" "HARWIN S2751-46R" 21.25,173.5 r270 top (schematic designator TP1)
TP1_Coil3 "Test Point" "HARWIN S2751-46R" 21.25,153.5 r270 top (schematic designator TP1)
TP1_Coil4 "Test Point" "HARWIN S2751-46R" 21.25,133.5 r270 top (schematic designator TP1)
TP1_Coil5 "Test Point" "HARWIN S2751-46R" 21.25,113.5 r270 top (schematic designator TP1)
TP1_Coil6 "Test Point" "HARWIN S2751-46R" 21.25,93.5 r270 top (schematic designator TP1)
TP1_Coil7 "Test Point" "HARWIN S2751-46R" 21.25,73.5 r270 top (schematic designator TP1)
TP1_Coil8 "Test Point" "HARWIN S2751-46R" 21.25,53.5 r270 top (schematic designator TP1)
TP2_Coil1 "Test Point" "HARWIN S2751-46R" 20.25,199.5 r180 top (schematic designator TP2)
TP2_Coil2 "Test Point" "HARWIN S2751-46R" 20.25,179.5 r180 top (schematic designator TP2)
TP2_Coil3 "Test Point" "HARWIN S2751-46R" 20.25,159.5 r180 top (schematic designator TP2)
TP2_Coil4 "Test Point" "HARWIN S2751-46R" 20.25,139.5 r180 top (schematic designator TP2)
TP2_Coil5 "Test Point" "HARWIN S2751-46R" 20.25,119.5 r180 top (schematic designator TP2)
TP2_Coil6 "Test Point" "HARWIN S2751-46R" 20.25,99.5 r180 top (schematic designator TP2)
TP2_Coil7 "Test Point" "HARWIN S2751-46R" 20.25,79.5 r180 top (schematic designator TP2)
TP2_Coil8 "Test Point" "HARWIN S2751-46R" 20.25,59.5 r180 top (schematic designator TP2)
TP3_Coil1 "Test Point" "HARWIN S2751-46R" 14.5,182 r90 top (schematic designator TP3)
TP3_Coil2 "Test Point" "HARWIN S2751-46R" 14.5,162 r90 top (schematic designator TP3)
TP3_Coil3 "Test Point" "HARWIN S2751-46R" 14.5,142 r90 top (schematic designator TP3)
TP3_Coil4 "Test Point" "HARWIN S2751-46R" 14.5,122 r90 top (schematic designator TP3)
TP3_Coil5 "Test Point" "HARWIN S2751-46R" 14.5,102 r90 top (schematic designator TP3)
TP3_Coil6 "Test Point" "HARWIN S2751-46R" 14.5,82 r90 top (schematic designator TP3)
TP3_Coil7 "Test Point" "HARWIN S2751-46R" 14.5,62 r90 top (schematic designator TP3)
TP3_Coil8 "Test Point" "HARWIN S2751-46R" 14.5,42 r90 top (schematic designator TP3)
TP4_Coil1 "Test Point" "HARWIN S2751-46R" 17.5,199.5 r180 top (schematic designator TP4)
TP4_Coil2 "Test Point" "HARWIN S2751-46R" 17.5,179.5 r180 top (schematic designator TP4)
TP4_Coil3 "Test Point" "HARWIN S2751-46R" 17.5,159.5 r180 top (schematic designator TP4)
TP4_Coil4 "Test Point" "HARWIN S2751-46R" 17.5,139.5 r180 top (schematic designator TP4)
TP4_Coil5 "Test Point" "HARWIN S2751-46R" 17.5,119.5 r180 top (schematic designator TP4)
TP4_Coil6 "Test Point" "HARWIN S2751-46R" 17.5,99.5 r180 top (schematic designator TP4)
TP4_Coil7 "Test Point" "HARWIN S2751-46R" 17.5,79.5 r180 top (schematic designator TP4)
TP4_Coil8 "Test Point" "HARWIN S2751-46R" 17.5,59.5 r180 top (schematic designator TP4)
TVS1 "TVS Bidirectional" "DO214AC SMA" 7.25,29.25 r0 top
TVS2_Coil1 "TVS Bidirectional" ? 10,190 r270 top (schematic designator TVS2)
TVS2_Coil2 "TVS Bidirectional" ? 10,170 r270 top (schematic designator TVS2)
TVS2_Coil3 "TVS Bidirectional" ? 10,150 r270 top (schematic designator TVS2)
TVS2_Coil4 "TVS Bidirectional" ? 10,130 r270 top (schematic designator TVS2)
TVS2_Coil5 "TVS Bidirectional" ? 10,110 r270 top (schematic designator TVS2)
TVS2_Coil6 "TVS Bidirectional" ? 10,90 r270 top (schematic designator TVS2)
TVS2_Coil7 "TVS Bidirectional" ? 10,70 r270 top (schematic designator TVS2)
TVS2_Coil8 "TVS Bidirectional" ? 10,50 r270 top (schematic designator TVS2)
U1 "74HC7541" TSSOP20_N 14.35,20.5 r270 top
U2 "ZXGD3005" SOT23-6_N 2.25,25.25 r90 top
U3_Coil1 "MCP6541U" SOT23-5_N 17.25,186.555 r270 top (schematic designator U3)
U3_Coil2 "MCP6541U" SOT23-5_N 17.25,166.555 r270 top (schematic designator U3)
U3_Coil3 "MCP6541U" SOT23-5_N 17.25,146.555 r270 top (schematic designator U3)
U3_Coil4 "MCP6541U" SOT23-5_N 17.25,126.555 r270 top (schematic designator U3)
U3_Coil5 "MCP6541U" SOT23-5_N 17.25,106.555 r270 top (schematic designator U3)
U3_Coil6 "MCP6541U" SOT23-5_N 17.25,86.555 r270 top (schematic designator U3)
U3_Coil7 "MCP6541U" SOT23-5_N 17.25,66.555 r270 top (schematic designator U3)
U3_Coil8 "MCP6541U" SOT23-5_N 17.25,46.555 r270 top (schematic designator U3)
X1 "FX23 Right Angle Receptacle" FX23-40S-0.5SH 11.25,3.5 r0 top

## Footprints (in the part's own frame and the unit in brackets; to place one, negate y for a bottom-side part, rotate by r counter-clockwise, add the part's x,y. Pads: shape width x height; smd on the part's side, far side on the other; paste and mask are expansions set on the pad)
C0603_N [mm] "Capacitor, Yageo CC Class2, SM0603, IPC Medium Density"
  rrect50% 0.8x0.8 smd: 1(-0.75,0) 2(0.75,0)
  silkscreen extent -0.2,-0.4 0.2,0.4, body extent -0.9,-0.5 0.9,0.5, height 0.9
C1206_N [mm] "Capacitor, Yageo CC Class2, SM1206, IPC Medium Density"
  rrect50% 1.4x1.9 smd: 1(-1.527,0) 2(1.527,0)
  silkscreen extent -0.3,-0.85 0.3,0.85, body extent -1.75,-0.95 1.75,0.95, height 1.8
"CAP FILM 5MM PITCH, 7.2X7.2MM" [mm] "Kemet J06, Wiha 1J"
  round 2 hole 1: 1(-2.5,0) 2(2.5,0)
  silkscreen extent -3.6,-3.6 3.6,3.6, body extent -3.75,-3.75 3.75,3.75, height 13
"DO214AC SMA" [mm] "Molded Diode, 2-Leads, Body 4.30x2.60mm, IPC Medium Density"
  rrect20% 1.4x1.64 smd: 1(-2.015,0) 2(2.015,0)
  silkscreen extent 1,-0.5 1,0.5, body extent -2.6,-1.37 2.6,1.37, height 2.4
F0603_N [mm] "Ferrite, Vishay"
  rrect50% 0.9x1 smd: 1(-0.8,0) 2(0.8,0)
  silkscreen extent -0.1,-0.3 0.1,0.3, body extent -0.8,-0.4 0.8,0.4, height 0.45
FX23-40S-0.5SH [mm] "FX23 Right Angle Receptacle 40 pos"
  rrect50% 0.3x1.65 smd: 1(-4.75,5.975) 2(-4.25,5.975) 3(-3.75,5.975) 4(-3.25,5.975) 5(-2.75,5.975) 6(-2.25,5.975) 7(-1.75,5.975) 8(-1.25,5.975) 9(-0.75,5.975) 10(-0.25,5.975) 11(0.25,5.975) 12(0.75,5.975) 13(1.25,5.975) 14(1.75,5.975) 15(2.25,5.975) 16(2.75,5.975) 17(3.25,5.975) 18(3.75,5.975) 19(4.25,5.975) 20(4.75,5.975)
  rrect50% 0.3x1.8 smd: 21(-4.75,-0.9) 22(-4.25,-0.9) 23(-3.75,-0.9) 24(-3.25,-0.9) 25(-2.75,-0.9) 26(-2.25,-0.9) 27(-1.75,-0.9) 28(-1.25,-0.9) 29(-0.75,-0.9) 30(-0.25,-0.9) 31(0.25,-0.9) 32(0.75,-0.9) 33(1.25,-0.9) 34(1.75,-0.9) 35(2.25,-0.9) 36(2.75,-0.9) 37(3.25,-0.9) 38(3.75,-0.9) 39(4.25,-0.9) 40(4.75,-0.9)
  round 1.6 hole 1.2: PWR1(-8.1,6.6) PWR2(6.4,6.6) PWR3(-6.4,4.85) PWR4(8.1,4.85)
  round 1.4 hole 1: TAB1(-9.5,0.2) TAB2(9.5,0.2)
  silkscreen extent -10.25,-1 10.25,8, body extent -10.25,-1.5 10.25,7, height 7.25
"HARWIN S2751-46R" [mm] "1.8mm x 1mm test point"
  rrect20% 1.8x1 smd: 1(0,0)
INSERT-THREAD-SMD-M2 [mm] "Wurth WA-SMSI"
  round 5.3 / inner round 3.5 / far side round 3.5 hole 3.1 paste-4 mask+0.102: 1(0,0)
"LED 0603/1608" [mm] "Chip Diode, 2-Leads, Body 1.60x0.80mm, IPC Medium Density"
  rrect30% 0.8x0.8 smd: 1(0.75,0) 2(-0.75,0)
  silkscreen extent -0.18,-0.4 1.4,0.4, body extent -0.8,-0.4 0.8,0.4, height 0.53
"LINOBYTE - MAGNETSWITCH" [mm]
  rrect60% 1.5x3 smd paste-2 mask+0.102: 1(0,3.5)
  rrect50% 3x4 smd paste-2 mask+0.102: 2(-3,-2.3) 3(3,-2.3)
  round 5 hole 2.6: M2(-7.5,0) M2(7.5,0)
  rrect20% 0x0 hole 3 unplated: ""(0,0)
  Top Layer region: -4.4,-0.5
  Top Layer region: -4.5,-0.5
  Top Layer pour cut-out: -4.6,4.7
  Keep-Out Layer circle w4: c0,0 r2
  silkscreen extent -4.3,-4.3 4.3,4.3
LINOBYTE-COIL [mm]
  rrect50% 3x2 smd: 1(-2,3) 2(-2,-3)
  round 4 / inner round 2.5 / far side round 4 hole 2: M2(-2.5,-7.5) M2(-2.5,7.5)
  body extent -24,-9.5 0,9.5, height 4.5
PCB-7SEG-10MM [mm]
  silkscreen extent -2.8,-5.1 2.8,5.1
R0603 [mm] "Chip Resistor; Body 1.6 x 0.9 mm (LxW typ)"
  rrect50% 0.9x1 smd: 1(-0.8,0) 2(0.8,0)
  silkscreen extent -0.1,-0.3 0.1,0.3, body extent -0.8,-0.4 0.8,0.4, height 0.45
SOD323F [mm] "SODFL, 2-Leads, Body 1.25x2.50mm, IPC Medium Density"
  rrect50% 0.8x0.6 smd: A(-1.2,0) K(1.2,0)
  silkscreen extent 0.6,-0.5 0.6,0.5, body extent -1.25,-0.62 1.25,0.63, height 0.8
SOT23-5_N [mm] "SOT23, 5-Leads, Body 2.9x1.6mm, Pitch 0.95mm, Lead Span 2.8mm, IPC Medium Density"
  rrect50% 1.1x0.55 smd: 1(-1.2,0.95) 2(-1.2,0) 3(-1.2,-0.95) 4(1.2,-0.95) 5(1.2,0.95)
  silkscreen extent -2,-1.55 0.4,1.55, body extent -0.9,-1.55 0.9,1.55, height 1.45
SOT23-6_N [mm] "SOT23, 6-Leads, Body 2.9x1.6mm, Pitch 0.95mm, Lead Span 2.8mm, IPC Medium Density"
  rrect50% 1.1x0.55 smd: 1(-1.2,0.95) 2(-1.2,0) 3(-1.2,-0.95) 4(1.2,-0.95) 5(1.2,0) 6(1.2,0.95)
  silkscreen extent -2.5,-1.55 0.4,1.55, body extent -0.9,-1.55 0.9,1.55, height 1.45
SOT23_N [mm] "SOT23, 3-Leads, Body 2.9x1.3mm, Pitch 0.95mm, Lead Span 2.5mm, IPC Medium Density"
  rrect50% 1.15x0.6 smd: 1(-1.125,0.95) 2(1.125,0) 3(-1.125,-0.95)
  silkscreen extent -1.9,-1.3 0.3,1.3, body extent -0.7,-1.5 0.7,1.5, height 1.1
TSSOP20_N [mm] "TSOP, 20-Leads, Body 6.5x4.4mm, Pitch 0.65mm, IPC Medium Density"
  oval 1.7x0.35 smd: 1(-2.85,2.925) 2(-2.85,2.275) 3(-2.85,1.625) 4(-2.85,0.975) 5(-2.85,0.325) 6(-2.85,-0.325) 7(-2.85,-0.975) 8(-2.85,-1.625) 9(-2.85,-2.275) 10(-2.85,-2.925) 11(2.85,-2.925) 12(2.85,-2.275) 13(2.85,-1.625) 14(2.85,-0.975) 15(2.85,-0.325) 16(2.85,0.325) 17(2.85,0.975) 18(2.85,1.625) 19(2.85,2.275) 20(2.85,2.925)
  silkscreen extent -2.8,-3 1.6,3.9, body extent -2.25,-3.3 2.25,3.3, height 1.1
YC164 [mm] "4 × 0603 (8P4R)  Resistor Array SMD"
  rrect50% 0.45x0.9 smd: 1(-1.2,-0.85) 2(-0.4,-0.85) 3(0.4,-0.85) 4(1.2,-0.85) 5(1.2,0.85) 6(0.4,0.85) 7(-0.4,0.85) 8(-1.2,0.85)
  silkscreen extent -1.5,-0.2 1.5,0.2, body extent -1.68,-0.88 1.68,0.88, height 0.71
? [mm] "SODFL, 2-Leads, Body 1.25x2.50mm, IPC Medium Density"
  rrect50% 1.2x1.2 smd: 1(-1.1,0) 2(1.1,0)
  silkscreen extent 0.3,-0.5 0.3,0.5, body extent -1.25,-0.62 1.25,0.63, height 0.8

## Part data
1_CH1 1_CH2 1_CH3 1_CH4 1_CH5 1_CH6 1_CH7 1_CH8: library part PCB-7Seg
C1_Coil1 C1_Coil2 C1_Coil3 C1_Coil4 C1_Coil5 C1_Coil6 C1_Coil7 C1_Coil8 C2_Coil1 C2_Coil2 C2_Coil3 C2_Coil4 C2_Coil5 C2_Coil6 C2_Coil7 C2_Coil8 C3 C4 C4_Coil1 C4_Coil2 C4_Coil3 C4_Coil4 C4_Coil5 C4_Coil6 C4_Coil7 C4_Coil8 C5 C7 C8 C9 C10 C11: library part Capacitor, "Capacitor MLCC", Manufacturer=Yageo, Manufacturer Part Number=CC0603KRX7R9BB104, Package=0603, Supplier Part Number 1=1362556, Tolerance (%)=10, Category=Capacitor, ComponentLink1Description="Manufacturer Website", ComponentLink1URL=http://www.yageo.com, Supplier 1=Farnell, Supplier 2=Digi-Key, Supplier Part Number 2=311-1344-1-ND
C6: library part "Capacitor - Film"
D4: library part "Diode Schottky"
FB1_Coil1 FB1_Coil2 FB1_Coil3 FB1_Coil4 FB1_Coil5 FB1_Coil6 FB1_Coil7 FB1_Coil8 R1_Coil1 R1_Coil2 R1_Coil3 R1_Coil4 R1_Coil5 R1_Coil6 R1_Coil7 R1_Coil8 R3_Coil1 R3_Coil2 R3_Coil3 R3_Coil4 R3_Coil5 R3_Coil6 R3_Coil7 R3_Coil8 R4_Coil1 R4_Coil2 R4_Coil3 R4_Coil4 R4_Coil5 R4_Coil6 R4_Coil7 R4_Coil8 R10 R11 R12 Rfb_Coil1 Rfb_Coil2 Rfb_Coil3 Rfb_Coil4 Rfb_Coil5 Rfb_Coil6 Rfb_Coil7 Rfb_Coil8 Rin_Coil1 Rin_Coil2 Rin_Coil3 Rin_Coil4 Rin_Coil5 Rin_Coil6 Rin_Coil7 Rin_Coil8: PackageDocument=Mar-2003, Code_IPC="1608 [0603]", ComponentLink1Description="Manufacturer Link", ComponentLink1URL=http://www.panasonic.com/industrial/components/resistive_products.htm, ComponentLink2Description=Datasheet, ComponentLink2URL=http://www.panasonic.com/industrial/components/pdf/AOA0000CE2.pdf, LatestRevisionDate=19-Mar-2004, LatestRevisionNote="Silkscreen size reduced.", PackageReference=3-0603, Published=17-Dec-2003, Publisher="Altium Limited"
SW1: library part "Linobyte - MagnetSwitch"
U1: "Schmitt Trigger Octal"
X1: library part FX23-40S-0.5SH, "FX23 Right Angle Receptacle 40 Pos"

## Free pads (board coordinates)
  round 2 hole 1.2: 3(2,37.5) ""(2,32.5)
  round 5 / inner round 3 / far side round 5 hole 2.6: ""(5,60) ""(5,80) ""(5,100) ""(5,120) ""(5,140) ""(5,160) ""(5,180) ""(5,200)
  round 1.5 / inner round 1.7 / far side round 1.5 hole 1.1: ""(11.5,30)

## Via types
v1: diameter 0.6, hole 0.3, Top Layer to Bottom Layer, 169 vias

## Nets (pads, with @x,y where several pads share a name; then routed paths per layer and width w, separated by ;. In a path a pad name is that pad's centre, name@x,y a point inside that pad or via, vN(x,y) a via of type N, cw(c..) or ccw(c..) an arc to the next point about the centre after c; other vN are vias at no path point)
+3V3: C3.1 C4_Coil1.1 C4_Coil2.1 C4_Coil3.1 C4_Coil4.1 C4_Coil5.1 C4_Coil6.1 C4_Coil7.1 C4_Coil8.1 C5.1 DClamp_Coil1.K DClamp_Coil2.K DClamp_Coil3.K DClamp_Coil4.K DClamp_Coil5.K DClamp_Coil6.K DClamp_Coil7.K DClamp_Coil8.K FB3.2 R7.1 R8_Coil1.1 R8_Coil2.1 R8_Coil3.1 R8_Coil4.1 R8_Coil5.1 R8_Coil6.1 R8_Coil7.1 R8_Coil8.1 U1.20 U3_Coil1.5 U3_Coil2.5 U3_Coil3.5 U3_Coil4.5 U3_Coil5.5 U3_Coil6.5 U3_Coil7.5 U3_Coil8.5 | length 24.3
  Top Layer w0.155: U3_Coil8.5@18.2,45.355 18.45,45.105 R8_Coil8.1@18.45,43.9 ; U3_Coil7.5@18.2,65.355 18.45,65.105 R8_Coil7.1@18.45,63.9 ; U3_Coil6.5@18.2,85.355 18.45,85.105 R8_Coil6.1@18.45,83.9 ; U3_Coil5.5@18.2,105.355 18.45,105.105 R8_Coil5.1@18.45,103.9 ; U3_Coil4.5@18.2,125.355 18.45,125.105 R8_Coil4.1@18.45,123.9 ; U3_Coil3.5@18.2,145.355 18.45,145.105 R8_Coil3.1@18.45,143.9 ; U3_Coil2.5@18.2,165.355 18.45,165.105 R8_Coil2.1@18.45,163.9 ; U3_Coil1.5@18.2,185.355 18.45,185.105 R8_Coil1.1@18.45,183.9 ; R7.1@18.775,21.175 18.775,21.525 19.5,22.25 v1(20.75,22.25) ; DClamp_Coil8.K@20.2,51.05 20.2,51 v1(20.75,50.45) ; DClamp_Coil7.K@20.2,71.05 20.2,71 v1(20.75,70.45) ; DClamp_Coil6.K@20.2,91.05 20.2,91 20.75,90.45 v1(20.75,90.25) ; DClamp_Coil5.K@20.2,111.05 20.2,111 v1(20.75,110.45) ; DClamp_Coil4.K@20.2,131.05 20.2,131 v1(20.7,130.5) ; DClamp_Coil3.K@20.2,151.05 20.2,151 20.75,150.45 v1(20.75,150.25) ; DClamp_Coil2.K@20.2,171.05 20.2,171 20.75,170.45 v1(20.75,170.25) ; DClamp_Coil1.K@20.2,191.05 20.2,191 v1(20.75,190.45)
  Top Layer w0.35: U1.20@17.275,17.65 17.275,18.925
  Top Layer w0.5: v1(9.25,19.75) C3.1@10,19.75
  other v1: 17.25,13.5 18,13.5 17.25,14.25 18,14.25 17.25,15 18,15 20.75,45.75 20.75,65.75 20.75,85.75 20.75,105.75 20.75,125.75 20.75,145.75 20.75,165.75 20.75,185.75
+12V: C7.1 C8.1 FB2.2 R10.2 R11.2 X1.PWR3
  other v1: 6.5,12.75 6.5,13.5 5.75,14.25 6.5,14.25 3.5,17.5 8.75,25.25 9.5,25.25 8.75,26 9.5,26 8.75,26.75 9.5,26.75
BIT0: R4.8 X1.16 | length 4.7
  Top Layer w0.155: X1.16@14,9.475 14,10.25 15.95,12.2 R4.8@15.95,13.4
BIT1: R4.7 X1.14 | length 4.8
  Top Layer w0.155: X1.14@13,9.475 13,10.25 15.15,12.4 R4.7@15.15,13.4
BIT2: R4.6 X1.12 | length 4.9
  Top Layer w0.155: X1.12@12,9.475 12,10.25 14.35,12.6 R4.6@14.35,13.4
BIT3: R4.5 X1.10 | length 5
  Top Layer w0.155: X1.10@11,9.475 11,10.25 13.55,12.8 R4.5@13.55,13.4
BIT4: R6.8 X1.8 | length 4.8
  Top Layer w0.155: X1.8@10,9.475 10,10.25 12.2,12.45 R6.8@12.2,13.4
BIT5: R6.7 X1.6 | length 4.9
  Top Layer w0.155: X1.6@9,9.475 9,10.25 11.4,12.65 R6.7@11.4,13.4
BIT6: R6.6 X1.4 | length 5
  Top Layer w0.155: X1.4@8,9.475 8,10.25 10.6,12.85 R6.6@10.6,13.4
BIT7: R6.5 X1.2 | length 5.1
  Top Layer w0.155: X1.2@7,9.475 7,10.25 9.8,13.05 R6.5@9.8,13.4
Coil1_BUS1: DR1_Coil1.A DR2_Coil1.K L1_CH1.2 TP2_Coil1.1 TVS2_Coil1.2 | length 25.6
  Top Layer w0.155: TVS2_Coil1.2@10,188.9 11.9,188.9 13.25,190.25 13.25,198.5 13.75,199 15.25,199 15.75,198.5 15.75,196.9 16.65,196 DR2_Coil1.K@16.7,196.05 DR1_Coil1.A@17.8,196.05 18.55,196.05 19,196.5 19,198 TP2_Coil1.1@20.25,199.25
  Top Layer w1: L1_CH1.2@10,187 TVS2_Coil1.2@10,188.9